# EAGLE board VisualightMicroBulb_042 (EAGLE 6.2)
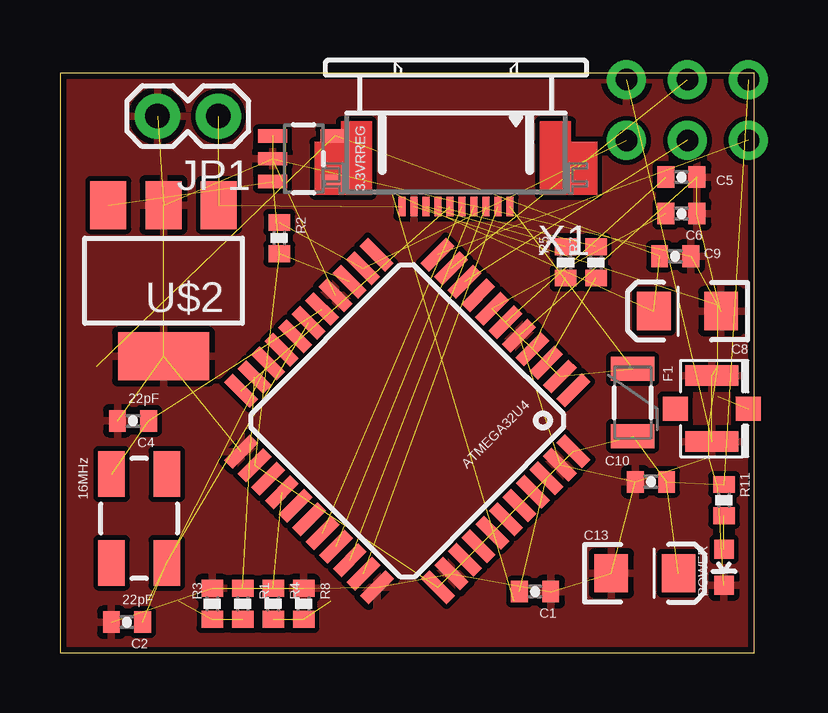
[diagram p0: board, top side]
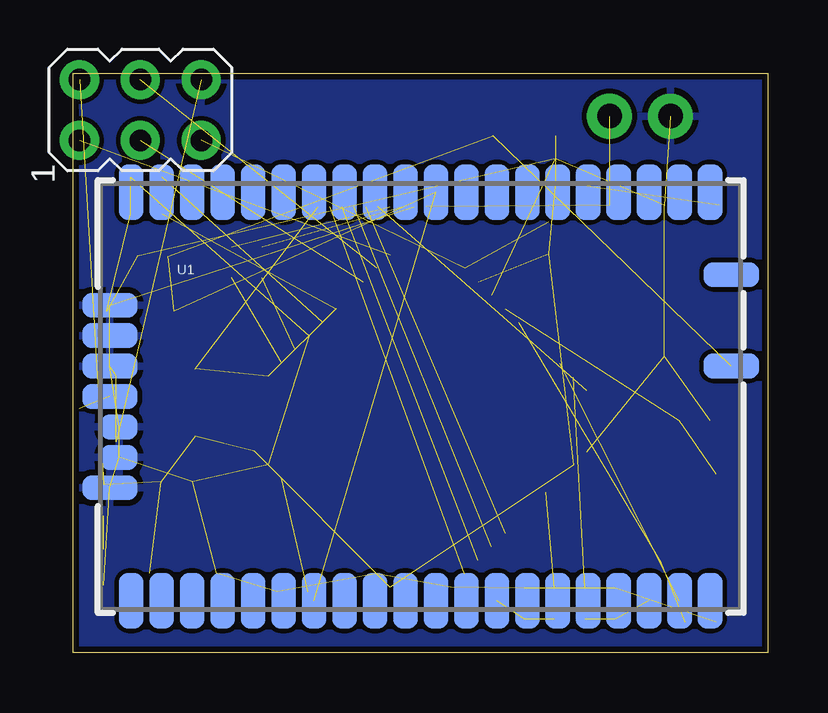
[diagram p1: board, bottom side, seen from below]

Size 28.96 x 24.13 mm. Coordinates in mm from the lower left corner, seen from the top.
Outline: 28.96,24.13 0,24.13 0,0 28.96,0 28.96,24.13
Copper layers (1*16): Top 0.035mm / dielectric 1.5mm / Bottom 0.035mm
Design rules: minimum track width 8mil, minimum drill 15mil, track to track 8mil, track to pad 8mil, pad to pad 8mil, via to via 8mil, smd to smd 8mil, copper to edge 10mil, drill to drill 8mil, minimum pad ring 12mil, minimum via ring 10mil, stop-mask expansion 4mil, vias tented up to drill 25mil, thermal gap 10mil
Net classes: 0 default: width 0.003 mm, drill 0.381 mm, clearance 0.152 mm

## Footprints (pad centres in the part's own frame; a part is rotated, then mirrored left to right if it is on the bottom)
SOT23-5 = smd 0.55 x 1.2: 1 -0.95,-1.3; 2 0,-1.3; 3 0.95,-1.3; 4 0.95,1.3; 5 -0.95,1.3
SPARKFUN-DIGITALIC_TQFP44 = smd 1.5 x 0.5: 1 -5.8,4; 2 -5.8,3.2; 3 -5.8,2.4; 4 -5.8,1.6; 5 -5.8,0.8; 6 -5.8,0; 7 -5.8,-0.8; 8 -5.8,-1.6; 9 -5.8,-2.4; 10 -5.8,-3.2; 11 -5.8,-4; 23 5.8,-4; 24 5.8,-3.2; 25 5.8,-2.4; 26 5.8,-1.6; 27 5.8,-0.8; 28 5.8,0; 29 5.8,0.8; 30 5.8,1.6; 31 5.8,2.4; 32 5.8,3.2; 33 5.8,4 | smd 0.5 x 1.5: 12 -4,-5.8; 13 -3.2,-5.8; 14 -2.4,-5.8; 15 -1.6,-5.8; 16 -0.8,-5.8; 17 0,-5.8; 18 0.8,-5.8; 19 1.6,-5.8; 20 2.4,-5.8; 21 3.2,-5.8; 22 4,-5.8; 34 4,5.8; 35 3.2,5.8; 36 2.4,5.8; 37 1.6,5.8; 38 0.8,5.8; 39 0,5.8; 40 -0.8,5.8; 41 -1.6,5.8; 42 -2.4,5.8; 43 -3.2,5.8; 44 -4,5.8
0402-CAP = smd 0.7 x 0.9: 1 -0.65,0; 2 0.65,0
EIA3216 = smd 1.4 x 1.6: A 1.4,0; C -1.4,0
PTC-1206 = smd 1 x 1.8: 1 -1.4,0; 2 1.4,0
AVRISP = drill 0.9 pad 1.626: 1 -1.27,2.54; 2 1.27,2.54; 3 -1.27,0; 4 1.27,0; 5 -1.27,-2.54; 6 1.27,-2.54
1X02 = drill 1.016 pad 1.88: 1 0,0; 2 2.54,0
LED-0603 = smd 0.8 x 0.8: A 0,-0.75; C 0,0.75
0402-RES = smd 0.7 x 0.9: 1 -0.65,0; 2 0.65,0
RN171 = smd 1.016 x 2.286: 1 12.065,8.509; 2 10.795,8.509; 3 9.525,8.509; 4 8.255,8.509; 5 6.985,8.509; 6 5.715,8.509; 7 4.445,8.509; 8 3.175,8.509; 9 1.905,8.509; 10 0.635,8.509; 11 -0.635,8.509; 12 -1.905,8.509; 13 -3.175,8.509; 14 -4.445,8.509; 15 -5.715,8.509; 16 -6.985,8.509; 17 -8.255,8.509; 18 -9.525,8.509; 19 -10.795,8.509; 20 -12.065,8.509; 28 -12.065,-8.509; 29 -10.795,-8.509; 30 -9.525,-8.509; 31 -8.255,-8.509; 32 -6.985,-8.509; 33 -5.715,-8.509; 34 -4.445,-8.509; 35 -3.175,-8.509; 36 -1.905,-8.509; 37 -0.635,-8.509; 38 0.635,-8.509; 39 1.905,-8.509; 40 3.175,-8.509; 41 4.445,-8.509; 42 5.715,-8.509; 43 6.985,-8.509; 44 8.255,-8.509; 45 9.525,-8.509; 46 10.795,-8.509; 47 12.065,-8.509 | smd 2.286 x 1.016: 21 -12.954,3.81; 22 -12.954,2.54; 23 -12.954,1.27; 24 -12.954,0; 27 -12.954,-3.81; 48 12.954,5.08; 49 12.954,1.27 | smd 1.524 x 1.016: 25 -12.573,-1.27; 26 -12.573,-2.54
U.FL = smd 2.2 x 0.85: P$1 0,1.375; P$2 0,-1.375 | smd 1.05 x 1: P$3 1.525,0; P$4 -1.525,0
SOT223 = smd 1.5 x 2: 1 -2.3,-3.15; 2 0,-3.15; 3 2.3,-3.15 | smd 3.8 x 2: 4 0,3.15
52745-1090 = smd 0.3 x 0.8: 1 -2.25,2.5; 2 -1.75,2.5; 3 -1.25,2.5; 4 -0.75,2.5; 5 -0.25,2.5; 6 0.25,2.5; 7 0.75,2.5; 8 1.25,2.5; 9 1.75,2.5; 10 2.25,2.5
CRYSTAL-SMD-5X3 = smd 1.9 x 1.1: 1 -1.85,-1.15; 2 1.85,-1.15; 3 1.85,1.15; 4 -1.85,1.15

## Placement (x,y rotation side)
3.3VRREG  MIC5219 3.3V  [SOT23-5]  10.16,20.57 270 top
ATMEGA32U4  ATMEGA32U4  [SPARKFUN-DIGITALIC_TQFP44]  14.48,9.65 225.1 top
C1  0.1uF  [0402-CAP]  19.81,2.54 180 top
C2  22pF  [0402-CAP]  2.79,1.27 180 top
C4  22pF  [0402-CAP]  3.05,9.65 180 top
C5  1uF  [0402-CAP]  25.91,19.81 180 top
C6  1uF  [0402-CAP]  25.91,18.29 180 top
C8  10uF  [EIA3216]  26.16,14.22 180 top
C9  0.1uF  [0402-CAP]  25.65,16.51 180 top
C10  1uF  [0402-CAP]  24.64,7.11 180 top
C13  10uF  [EIA3216]  24.38,3.3 0 top
F1  500mA  [PTC-1206]  23.88,10.41 270 top
ISP1  AVRISP-6  [AVRISP]  26.16,22.61 90 bottom
JP1  [1X02]  6.6,22.35 180 top
POWER  Red  [LED-0603]  27.69,3.56 180 top
R1  2.2K  [0402-RES]  7.62,2.03 270 top
R2  10K  [0402-RES]  9.14,17.27 270 top
R3  3.3K  [0402-RES]  6.35,2.03 270 top
R4  2.2K  [0402-RES]  8.89,2.03 270 top
R5  22  [0402-RES]  21.08,16.26 90 top
R7  22  [0402-RES]  22.35,16.26 90 top
R8  3.3K  [0402-RES]  10.16,2.03 270 top
R11  1K  [0402-RES]  27.69,6.35 90 top
U1  RN171RN171  [RN171]  14.48,10.67 0 bottom
U$1  U.FL  [U.FL]  27.18,10.16 0 top
U$2  MIC5239  [SOT223]  4.32,15.49 180 top
X1  52745-1090  [52745-1090]  16.51,21.08 180 top
Y1  16MHz  [CRYSTAL-SMD-5X3]  3.3,5.59 270 top

## Library data of the parts
3.3VRREG = SparkFun-PowerIC; PROD_ID: VREG-09872
ATMEGA32U4 = SparkFun-DigitalIC
C1 C2 C4-C6 C8-C10 C13 F1 POWER R1-R5 R7 R8 R11 Y1 = SparkFun
ISP1 = adafruit
JP1 U$1 = SparkFun-Connectors
U1 = SparkFun-RF
U$2 = v-reg
X1 = con-molex; MPN: 52745-1090; OC_FARNELL: unknown; OC_NEWARK: 92M6380

## Nets
+3V3_OUT: 3.3VRREG.5 C8.A C9.2 U1.10 U1.34 U1.49
A0: ATMEGA32U4.36
A1: ATMEGA32U4.37
A2: ATMEGA32U4.38
A3: ATMEGA32U4.39
A4: ATMEGA32U4.40
A5: ATMEGA32U4.41
ANT: U1.24 U$1.P$3
AREF: ATMEGA32U4.42 C1.2
D2: ATMEGA32U4.19
D3: ATMEGA32U4.18
D4: ATMEGA32U4.25
D5: ATMEGA32U4.31 X1.3
D6: ATMEGA32U4.27
D7: ATMEGA32U4.1
D8: ATMEGA32U4.28
D9: ATMEGA32U4.29 X1.5
D10: ATMEGA32U4.30 X1.4
D11: ATMEGA32U4.12
D12: ATMEGA32U4.26 R4.1
D13: ATMEGA32U4.32 X1.2
D17: ATMEGA32U4.8
D+: ATMEGA32U4.4 R5.1
D+IN: R7.2 X1.7
D-: ATMEGA32U4.3 R7.1
D-IN: R5.2 X1.8
GND [vcc]: 3.3VRREG.2 ATMEGA32U4.5 ATMEGA32U4.15 ATMEGA32U4.23 ATMEGA32U4.33 ATMEGA32U4.35 ATMEGA32U4.43 C1.1 C2.2 C4.2 C5.1 C6.1 C8.C C9.1 C10.2 C13.C ISP1.6 JP1.2 POWER.C R3.1 R8.1 U1.21 U1.22 U1.23 U1.25 U1.26 U1.27 U$1.P$1 U$1.P$2 U$2.2 U$2.4 X1.9
MISO: ATMEGA32U4.11 ISP1.1
MOSI: ATMEGA32U4.10 ISP1.4
N$1: ATMEGA32U4.16 C4.1 Y1.1
N$2: ATMEGA32U4.17 C2.1 Y1.3
N$4: ATMEGA32U4.6 C5.2
N$38: POWER.A R11.1
RAW: JP1.1 U$2.1 X1.10
RESET: ATMEGA32U4.13 ISP1.5 R2.1
SCK: ATMEGA32U4.9 ISP1.3
TX: ATMEGA32U4.21 R1.1
TXLED: ATMEGA32U4.22 X1.6
UVCC: ATMEGA32U4.2 ATMEGA32U4.7 C6.2 F1.1 X1.1
VCC: 3.3VRREG.1 3.3VRREG.3 ATMEGA32U4.14 ATMEGA32U4.24 ATMEGA32U4.34 ATMEGA32U4.44 C10.1 C13.A F1.2 ISP1.2 R2.2 R11.2 U$2.3
WIFIDIN: R1.2 R3.2 U1.45
WIFIDOUT: ATMEGA32U4.20 U1.46
WIFIRESET: R4.2 R8.2 U1.40

## Tracks (layer width: path | path; a pad name or v marks a point on that pad's centre or on a via)
+3V3_OUT  (5 unrouted)
ANT  (1 unrouted)
AREF  (1 unrouted)
D5  (1 unrouted)
D9  (1 unrouted)
D10  (1 unrouted)
D12  (1 unrouted)
D13  (1 unrouted)
D+  (1 unrouted)
D+IN  (1 unrouted)
D-  (1 unrouted)
D-IN  (1 unrouted)
GND  (31 unrouted)
  pour Bottom: 0,0 0,24.13 31.24,24.13 31.24,0
  pour Top: 0,0 0,24.13 31.24,24.13 31.24,0
MISO  (1 unrouted)
MOSI  (1 unrouted)
N$1  (2 unrouted)
N$2  (2 unrouted)
N$4  (1 unrouted)
N$38  (1 unrouted)
RAW  (2 unrouted)
RESET  (2 unrouted)
SCK  (1 unrouted)
TX  (1 unrouted)
TXLED  (1 unrouted)
UVCC  (4 unrouted)
VCC  (12 unrouted)
WIFIDIN  (2 unrouted)
WIFIDOUT  (1 unrouted)
WIFIRESET  (2 unrouted)